# EAGLE board BUS_BOARD_V1 (EAGLE 6.4)

Size 92.69 x 66.98 mm. Coordinates in mm from the lower left corner, seen from the top.
Outline: 0,0 92.69,0 92.69,66.98 0,66.98 0,0
Copper layers (1*16): Top 0.035mm / dielectric 1.5mm / Bottom 0.035mm
Design rules "default": minimum track width 10mil, minimum drill 24mil, track to track 8mil, track to pad 8mil, pad to pad 8mil, via to via 8mil, smd to smd 8mil, copper to edge 40mil, drill to drill 8mil, minimum pad ring 10mil, minimum via ring 8mil, stop-mask expansion 4mil, vias tented up to drill 0mil, thermal gap 10mil

## Footprints (pad centres in the part's own frame; a part is rotated, then mirrored left to right if it is on the bottom)
61201022021 = drill 1.1: 1 5.08,1.27; 2 5.08,-1.27; 3 2.54,1.27; 4 2.54,-1.27; 5 0,1.27; 6 0,-1.27; 7 -2.54,1.27; 8 -2.54,-1.27; 9 -5.08,1.27; 10 -5.08,-1.27
61201622021 = drill 1.1: 1 5.08,1.27; 2 5.08,-1.27; 3 2.54,1.27; 4 2.54,-1.27; 5 0,1.27; 6 0,-1.27; 7 -2.54,1.27; 8 -2.54,-1.27; 9 -5.08,1.27; 10 -5.08,-1.27; 11 -7.62,1.27; 12 -7.62,-1.27; 13 -10.16,1.27; 14 -10.16,-1.27; 15 -12.7,1.27; 16 -12.7,-1.27
22-23-2041 = drill 1 long: 1 -3.81,0; 2 -1.27,0; 3 1.27,0; 4 3.81,0
DIL16 = drill 0.813 long: 1 -8.89,-3.81; 2 -6.35,-3.81; 3 -3.81,-3.81; 4 -1.27,-3.81; 5 1.27,-3.81; 6 3.81,-3.81; 7 6.35,-3.81; 8 8.89,-3.81; 9 8.89,3.81; 10 6.35,3.81; 11 3.81,3.81; 12 1.27,3.81; 13 -1.27,3.81; 14 -3.81,3.81; 15 -6.35,3.81; 16 -8.89,3.81
SO16 = smd 0.6 x 1.2: 1 -4.445,-2.8; 2 -3.175,-2.8; 3 -1.905,-2.8; 4 -0.635,-2.8; 5 0.635,-2.8; 6 1.905,-2.8; 7 3.175,-2.8; 8 4.445,-2.8; 9 4.445,2.8; 10 3.175,2.8; 11 1.905,2.8; 12 0.635,2.8; 13 -0.635,2.8; 14 -1.905,2.8; 15 -3.175,2.8; 16 -4.445,2.8

## Placement (x,y rotation side)
10PIN  61201022021  [61201022021]  58.42,11.43 0 top
16PIN  61201622021  [61201622021]  58.42,31.75 0 top
FAN1  22-23-2041  [22-23-2041]  80.14,53.34 0 top
FAN2  22-23-2041  [22-23-2041]  64.77,53.34 0 top
FAN3  22-23-2041  [22-23-2041]  49.53,53.34 0 top
FAN4  22-23-2041  [22-23-2041]  34.29,53.34 0 top
MULTIPLEX1  4051N  [DIL16]  16.51,21.59 90 top
U$1  74HC4051_MUX  [SO16]  7.62,-7.62 0 top  (outside the outline)

## Library data of the parts
10PIN 16PIN = Wuerth_Elektronik_eiCan_05_Box_Header_IDC_Connectors_1_2
FAN1-FAN4 = con-molex; MF: MOLEX; MPN: 22-23-2041; OC_FARNELL: 1462920; OC_NEWARK: 38C0355
MULTIPLEX1 = 40xx
U$1 = SparkFun-AnalogIC

## Nets
+3V3: 10PIN.5 16PIN.11
+12V: 16PIN.13 FAN1.2 FAN2.2 FAN3.2 FAN4.2
DIG1: 16PIN.10 MULTIPLEX1.11
DIG2: 16PIN.12 MULTIPLEX1.10
DIG3: 16PIN.14 MULTIPLEX1.9
FAN1_PWM: 16PIN.1 FAN1.4
FAN1_TACHO: 16PIN.2 FAN1.3
FAN2_PWM: 16PIN.3 FAN2.4
FAN2_TACHO: 16PIN.4 FAN2.3
FAN3_PWM: 16PIN.5 FAN3.4
FAN3_TACHO: 16PIN.6 FAN3.3
FAN4_PWM: 16PIN.7 FAN4.4
FAN4_TACHO: 16PIN.8 FAN4.3
GND: 10PIN.3 16PIN.15 FAN1.1 FAN2.1 FAN3.1 FAN4.1 MULTIPLEX1.8
MUX1: 16PIN.16 MULTIPLEX1.3
N$1: U$1.1
N$2: U$1.2
N$3: U$1.3
N$4: U$1.4
N$5: U$1.5
N$6: U$1.6
N$7: U$1.7
N$8: U$1.8
N$9: U$1.9
N$10: U$1.10
N$11: U$1.11
N$12: U$1.12
N$13: U$1.13
N$14: U$1.14
N$15: U$1.15
N$16: U$1.16
PHOTO0: 10PIN.4 MULTIPLEX1.13
PHOTO1: 10PIN.2 MULTIPLEX1.14
PHOTO2: 10PIN.1 MULTIPLEX1.15
PHOTO3: 10PIN.7 MULTIPLEX1.12
PHOTO4: 10PIN.9 MULTIPLEX1.1
PHOTO5: 10PIN.10 MULTIPLEX1.5
PHOTO6: 10PIN.8 MULTIPLEX1.2
PHOTO7: 10PIN.6 MULTIPLEX1.4
VCC: MULTIPLEX1.16
VEE: MULTIPLEX1.7

## Tracks (layer width: path | path; a pad name or v marks a point on that pad's centre or on a via)
+3V3  (1 unrouted)
+12V  (4 unrouted)
DIG1  (1 unrouted)
DIG2  (1 unrouted)
DIG3  (1 unrouted)
FAN1_PWM  (1 unrouted)
FAN1_TACHO  (1 unrouted)
FAN2_PWM  (1 unrouted)
FAN2_TACHO  (1 unrouted)
FAN3_PWM  (1 unrouted)
FAN3_TACHO  (1 unrouted)
FAN4_PWM  (1 unrouted)
FAN4_TACHO  (1 unrouted)
GND  (6 unrouted)
MUX1  (1 unrouted)
PHOTO0  (1 unrouted)
PHOTO1  (1 unrouted)
PHOTO2  (1 unrouted)
PHOTO3  (1 unrouted)
PHOTO4  (1 unrouted)
PHOTO5  (1 unrouted)
PHOTO6  (1 unrouted)
PHOTO7  (1 unrouted)